# Altium PCB currentsource.PcbDoc
Units mm, origin at the board's own origin, x right, y up, seen from the top; angles counter-clockwise.
Board outline 50 x 80 mm, 2 copper layers (Top Layer, Bottom Layer); 18 components, 15 nets, 59 pads, 0 vias.
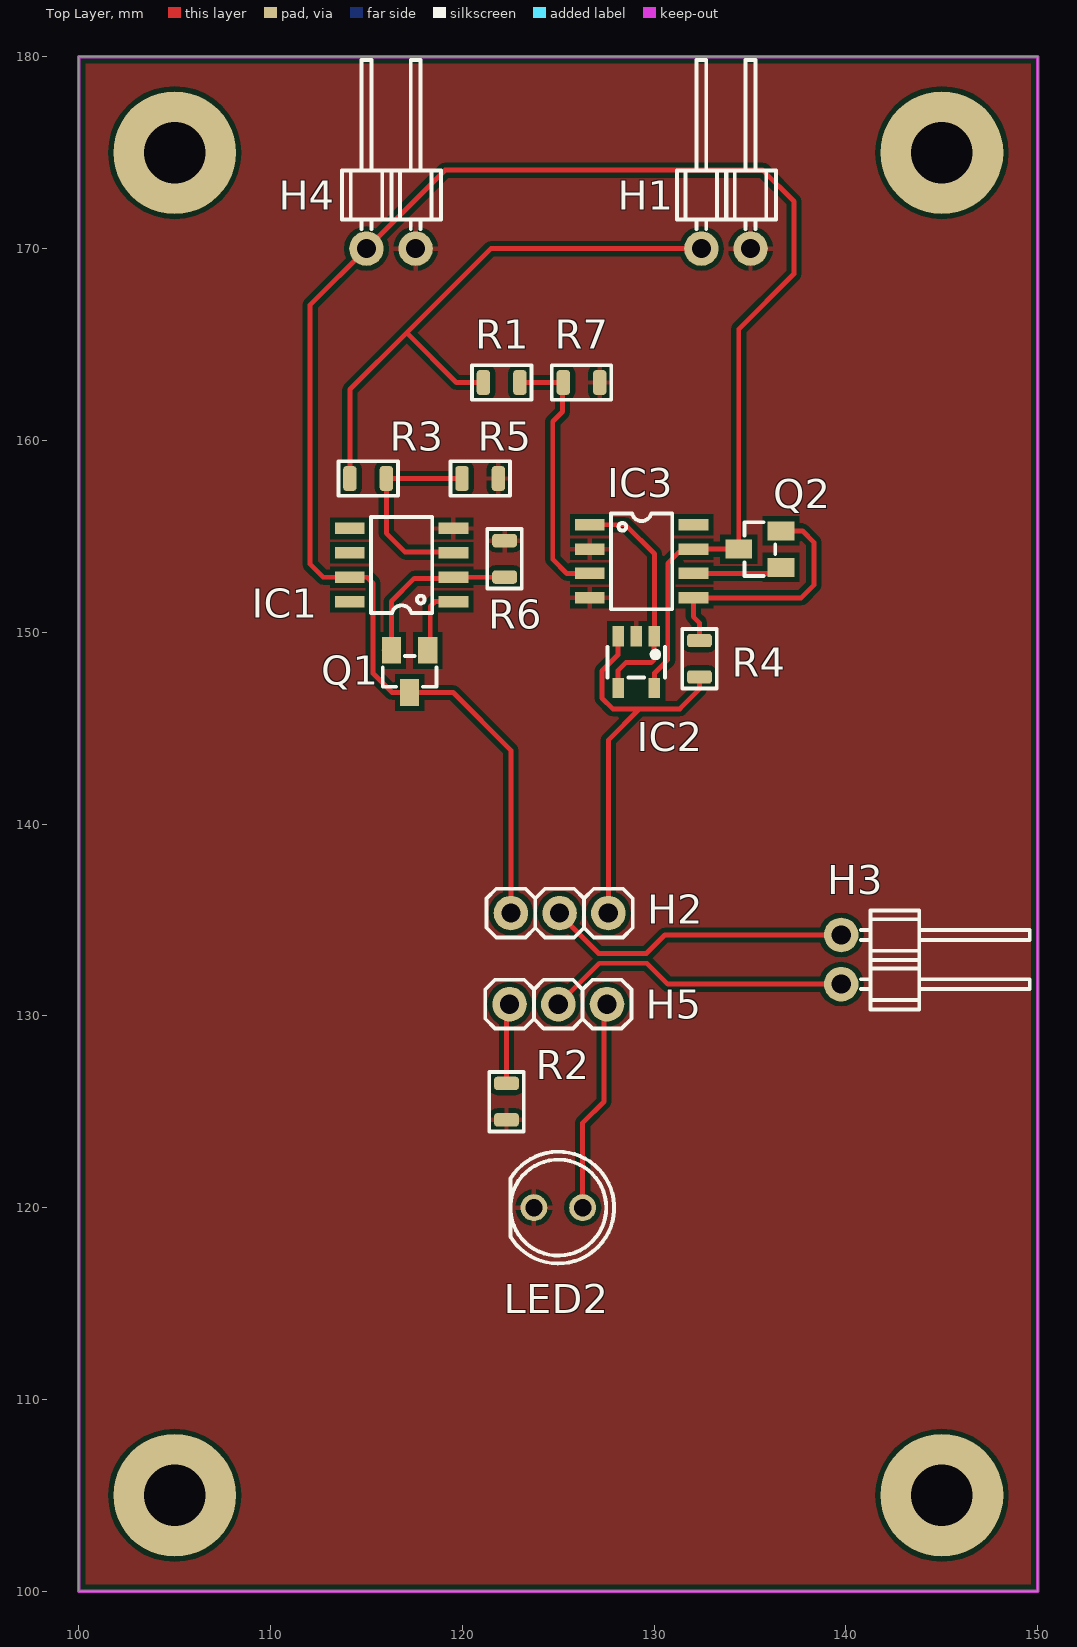
[diagram p0: Top Layer view]
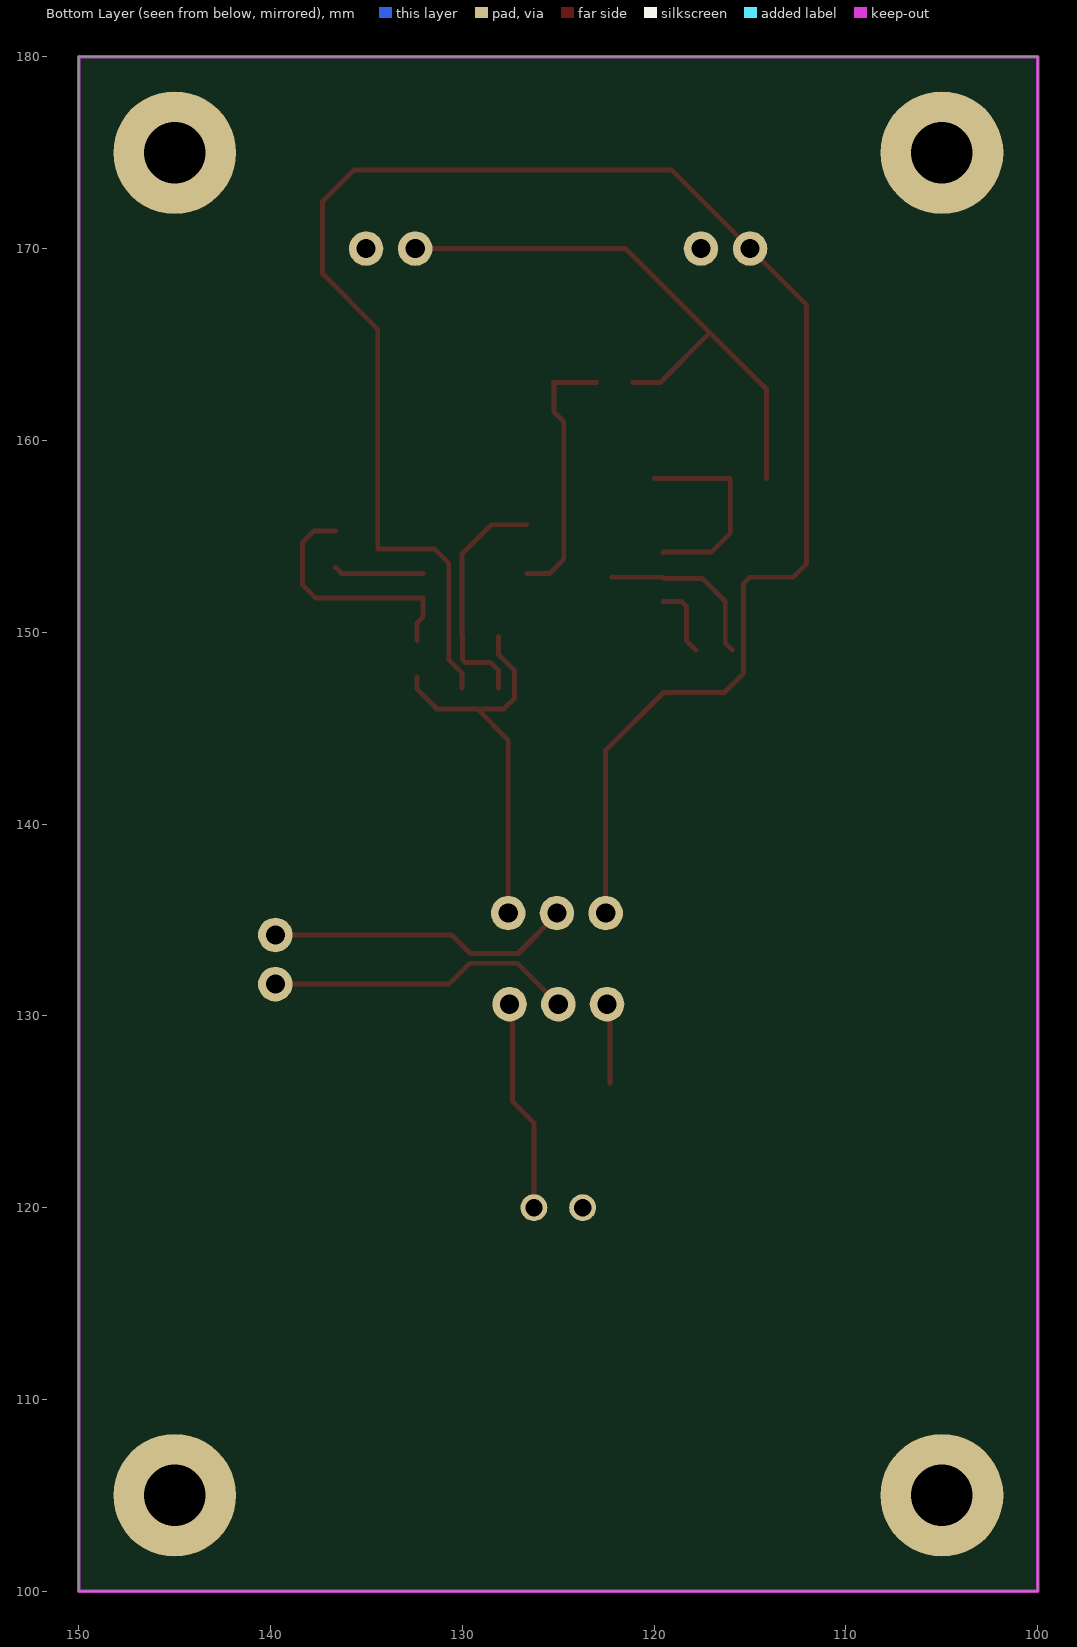
[diagram p1: Bottom Layer view, seen from below]

## Layer stack, top to bottom
Top Solder: solder mask 0.0102, Solder Resist, Dk 3.5
Top Layer: signal copper 0.0356
Dielectric 1: dielectric 0.32, FR-4, Dk 4.8
Bottom Layer: signal copper 0.0356
Bottom Solder: solder mask 0.0102, Solder Resist, Dk 3.5

## Board outline
100,100 100,180 150,180 150,100

## Design rules (kind name [scope] priority, off if disabled: settings)
Clearance [All] p1: gap=0.254
PolygonConnect [All] p1: connectstyle=Relief reliefconductorwidth=0.254 reliefentries=4 polygonreliefangle="90 Angle" airgapwidth=0.254
RoutingVias [All] p1: holewidth=0.711 width=1.27 viastyle="Through Hole" minholewidth=0.711 minwidth=1.27 maxholewidth=0.711 maxwidth=1.27
SolderMaskExpansion [All] p1: expansion=0.102
Width [All] p1: maxlimit=0.254 minlimit=0.254 preferedwidth=0.254
30 further rules are at their usual default settings.

## Components (designator, comment, footprint, x,y, rotation, side; value= is the part's Value field where it differs from the comment)
H1 "Header_2" Header_Male_2_right 132.46,170 r0 top
H2 "Header_3" Header_MALE_3 122.53,135.357 r0 top
H3 "Header_2" Header_Male_2_right 139.751,134.214 r270 top
H4 "Header_2" Header_Male_2_right 115,170 r0 top
H5 "Header_3" Header_MALE_3 122.46,130.607 r0 top
IC1 "AD8551" 8-SOIC 119.532,151.597 r90 top
IC2 "AD8603" 5-TSOT 129.064,148.438 r180 top
IC3 "AD8276" 8-SOIC 126.644,155.6 r270 top
LED2 "LED" LED_5MM_TROUGH 125,120 r180 top
Q1 "MMBT3904" 3-SOT-23 117.246,147.98 r180 top
Q2 "MMBT3904" 3-SOT-23 135.534,154.33 r90 top
R1 "1K" R0805 122.047,163.017 r0 top
R2 "200" R0805 122.301,125.527 r270 top
R3 "19K" R0805 115.087,158.013 r0 top
R4 "100" R0805 132.359,148.615 r90 top
R5 "1K" R0805 120.929,158.013 r180 top
R6 "5" R0805 122.199,153.822 r90 top
R7 "1K" R0805 126.213,163.017 r0 top

## Footprints (in the part's own frame and the unit in brackets; to place one, negate y for a bottom-side part, rotate by r counter-clockwise, add the part's x,y. Pads: shape width x height; smd on the part's side, far side on the other; paste and mask are expansions set on the pad)
3-SOT-23 [mm]
  rect 1x1.4 smd: 1(-0.95,-1.075) 2(0.95,-1.075) 3(0,1.125)
  silkscreen extent -1.4,-0.77 1.4,0.83, body extent -1.4,-1.47 1.4,1.53, height 1
5-TSOT [mm]
  rect 0.6x1.05 smd mask+0.07: 1(-0.95,-1.35) 2(0,-1.35) 3(0.95,-1.35) 4(0.95,1.35) 5(-0.95,1.35)
  silkscreen extent -1.5,-0.8 1.5,0.8, body extent -1.5,-1.5 1.5,1.5, height 1
8-SOIC [mm]
  rect 0.6x1.55 smd: 1(0,0) 2(1.27,0) 3(2.54,0) 4(3.81,0) 5(3.81,5.4) 6(2.54,5.4) 7(1.27,5.4) 8(0,5.4)
  silkscreen extent -0.6,1.1 4.41,4.3, body extent -0.6,-0.3 4.41,5.7, height 1.5
Header_Male_2_right [mm]
  round 1.8 hole 1: 1(0,0) 2(2.563,0)
  silkscreen extent -1.27,1.02 3.88,9.83, body extent -1.3,-0.32 3.83,9.83, height 2.56
Header_MALE_3 [mm]
  round 1.8 hole 1: 1(0,0) 2(2.54,0) 3(5.08,0)
  silkscreen extent -1.27,-1.27 6.35,1.27, body extent -1.27,-1.27 6.35,1.27, height 8.34
LED_5MM_TROUGH [mm] "5mm Round LED"
  round 1.4 hole 0.9: A(-1.27,0) C(1.27,0)
  silkscreen extent -2.91,-2.92 2.5,2.92, body extent -2.92,-2.93 2.5,2.93, height 8.8
R0805 [mm]
  rrect50% 0.7x1.3 smd: 1(-0.95,0) 2(0.95,0)
  silkscreen extent -1.55,-0.9 1.55,0.9, body extent -1.01,-0.61 1.01,0.61, height 0.51

## Part data
H1 H3 H4: "Generic 2pin header symbol"
H2 H5: "Generic 3pin header symbol"
IC1: library part AD8551ARZ, "Zero  -Drift, Single  -Supply, Rail  -to-Rail   Input/Output Operational Amplifiers"
IC2: library part AD8603AUJZ, "Rail-to-Rail Input/Output Operational Amplifier"
IC3: library part AD8276ARZ, "Unity-Gain Difference Amplifier"
LED2: "Schematic symbol of a LED"
Q1 Q2: "40V NPN SMALL SIGNAL TRANSISTOR IN SOT23"
R1 R2 R3 R4 R5 R6 R7: library part Resistor, "Schematic symbol of a resistor"

## Free pads (board coordinates)
  round 6.4 hole 3.2: 2(105,105) 2(105,175) 2(145,105) 2(145,175)

## Nets (pads, with @x,y where several pads share a name; then routed paths per layer and width w, separated by ;. In a path a pad name is that pad's centre, name@x,y a point inside that pad or via, vN(x,y) a via of type N, cw(c..) or ccw(c..) an arc to the next point about the centre after c; other vN are vias at no path point)
AD8276_REF: IC3.3 R1.2 R7.1 | length 13.9
  Top Layer w0.254: R1.2 R7.1 125.222,162.977 125.222,161.493 124.714,160.985 124.714,153.797 125.451,153.06 IC3.3
GND: H1.2 H4.2 IC1.4 IC2.2 IC3.2 IC3.4 LED2.C R2.2 R5.1 R6.2 R7.2
NetH2_2: H2.2 H3.1 | length 16
  Top Layer w0.254: H2.2 125.07,135.28 127.102,133.248 129.591,133.248 130.556,134.214 H3.1
NetH3_2: H3.2 H5.2 | length 16.1
  Top Layer w0.254: H5.2 127.134,132.74 129.616,132.74 130.706,131.651 H3.2
NetH5_1: H5.1 R2.1 | length 4.1
  Top Layer w0.254: R2.1 H5.1@122.301,130.607
NetH5_3: H5.3 LED2.A | length 11.1
  Top Layer w0.254: LED2.A 126.27,124.416 127.381,125.527 H5.3@127.381,130.607
NetIC1_1: IC1.1 Q1.1 | length 3.8
  Top Layer w0.254: Q1.1@117.815,149.055 118.323,149.563 118.323,151.343 118.577,151.597 IC1.1
NetIC1_2: IC1.2 Q1.2 R6.1 | length 9.1
  Top Layer w0.254: Q1.2@115.915,149.055 116.296,149.436 116.296,151.602 117.5,152.806 119.471,152.806 IC1.2 122.194,152.867 R6.1
NetIC1_3: IC1.3 R3.2 R5.2 | length 10.7
  Top Layer w0.254: IC1.3 119.492,154.178 117.018,154.178 116.037,155.158 R3.2 R5.2
NetIC2_1: IC2.1 IC2.4 IC3.1 | length 12.6
  Top Layer w0.254: IC3.1 128.499,155.6 130.014,154.085 IC2.1 129.997,149.771 129.997,148.565 129.845,148.412 128.524,148.412 128.118,148.006 128.118,147.091 IC2.4
NetIC3_5: IC3.5 Q2.2 R4.2 | length 13.1
  Top Layer w0.254: R4.2 132.359,150.495 132.044,150.81 IC3.5 137.668,151.79 138.328,152.451 138.328,154.686 137.734,155.28 Q2.2
NetIC3_6: IC3.6 Q2.1 | length 4.7
  Top Layer w0.254: IC3.6 136.289,153.06 Q2.1
RLOAD_1: H2.3 IC2.3 R4.1 | length 21.3
  Top Layer w0.254: H2.3 127.61,144.374 129.235,145.999 ; IC2.3 128.114,148.815 127.279,147.98 127.279,146.559 127.839,145.999 129.235,145.999 ; 131.343,145.999 131.325,145.999 ; R4.1 132.359,147.033 131.325,145.999 ; 129.235,145.999 131.325,145.999
RLOAD_2: H2.1 H4.1 IC1.7 IC2.5 IC3.7 Q1.3 Q2.3 | length 98.2
  Top Layer w0.254: H2.1 122.53,143.84 119.514,146.855 Q1.3 116.339,146.855 115.341,147.853 115.341,152.552 115.026,152.867 IC1.7 112.74,152.867 112.065,153.543 112.065,167.065 H4.1 119.092,174.092 135.661,174.092 137.287,172.466 137.287,168.681 134.409,165.804 Q2.3 IC3.7 131.445,154.33 130.708,153.594 130.708,148.557 130.014,147.863 IC2.5
V_REF: H1.1 R1.1 R3.1 | length 31.1
  Top Layer w0.254: R3.1 114.137,162.651 117.094,165.608 ; R1.1 119.685,163.017 117.094,165.608 ; H1.1 121.486,170 117.094,165.608
pads on no net: IC1.5 IC1.6 IC1.8 IC3.8

## Polygon pours and split planes (outlines as drawn)
GND on Top Layer "GND" (solid, pour order 2): 100,100 100,180 150,180 150,100

## Keep-outs
Keep-Out Layer:
  the board outline again, w0.2